# Altium PCB DiPho_PoE_adapter.PcbDoc
Units mm, origin at the board's own origin, x right, y up, seen from the top; angles counter-clockwise.
Board outline 57.6 x 55.8 mm, 4 copper layers (Top Layer, Inner Layer 1, Inner Layer 2, Bottom Layer), stack 1.51 mm thick; 53 components, 40 nets, 194 pads, 51 vias.
Unrouted connection lines stored in the file: 13.
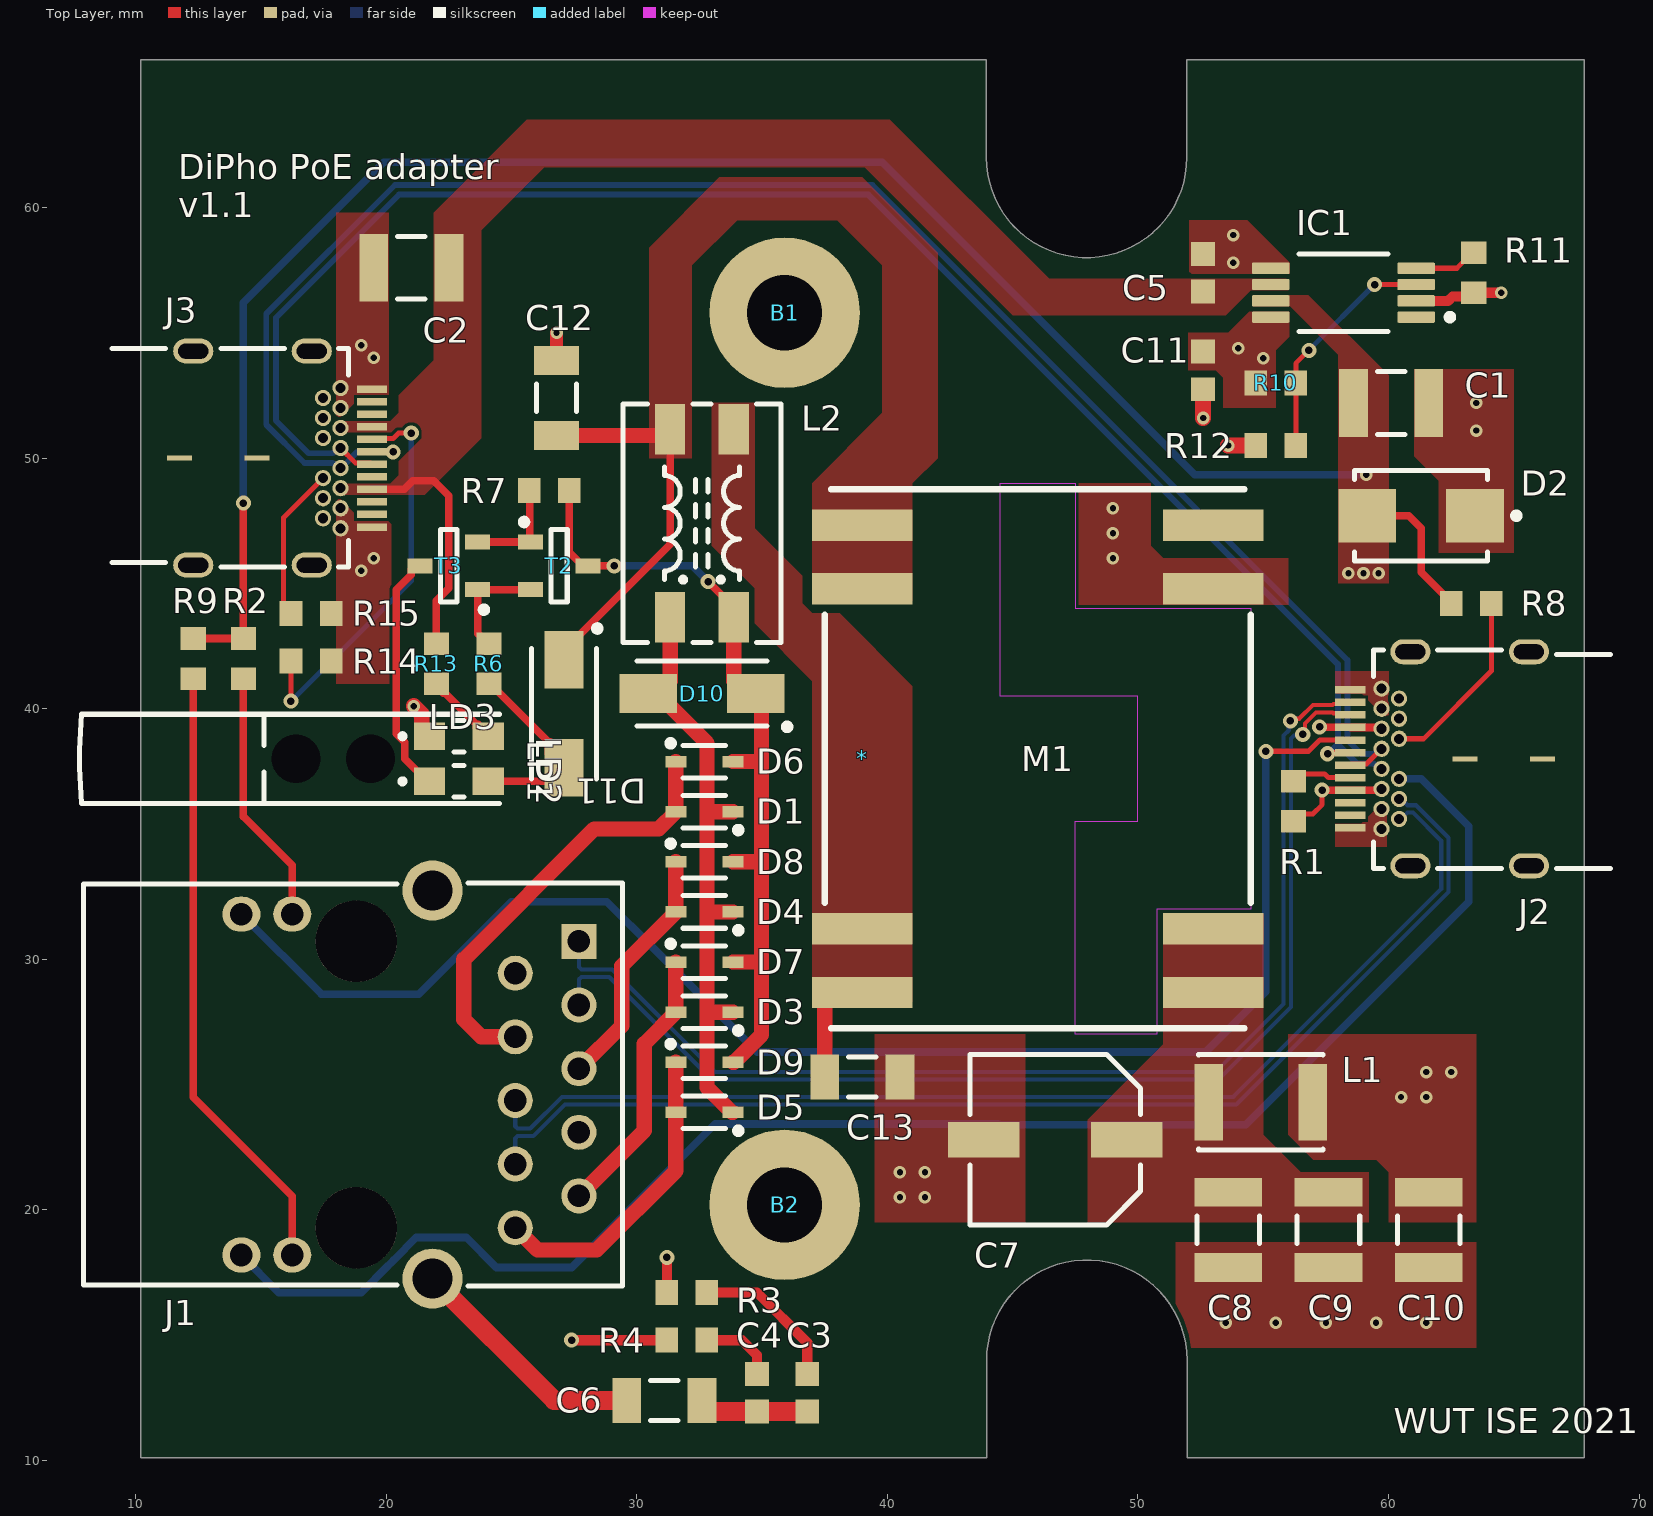
[diagram p0: Top Layer view]
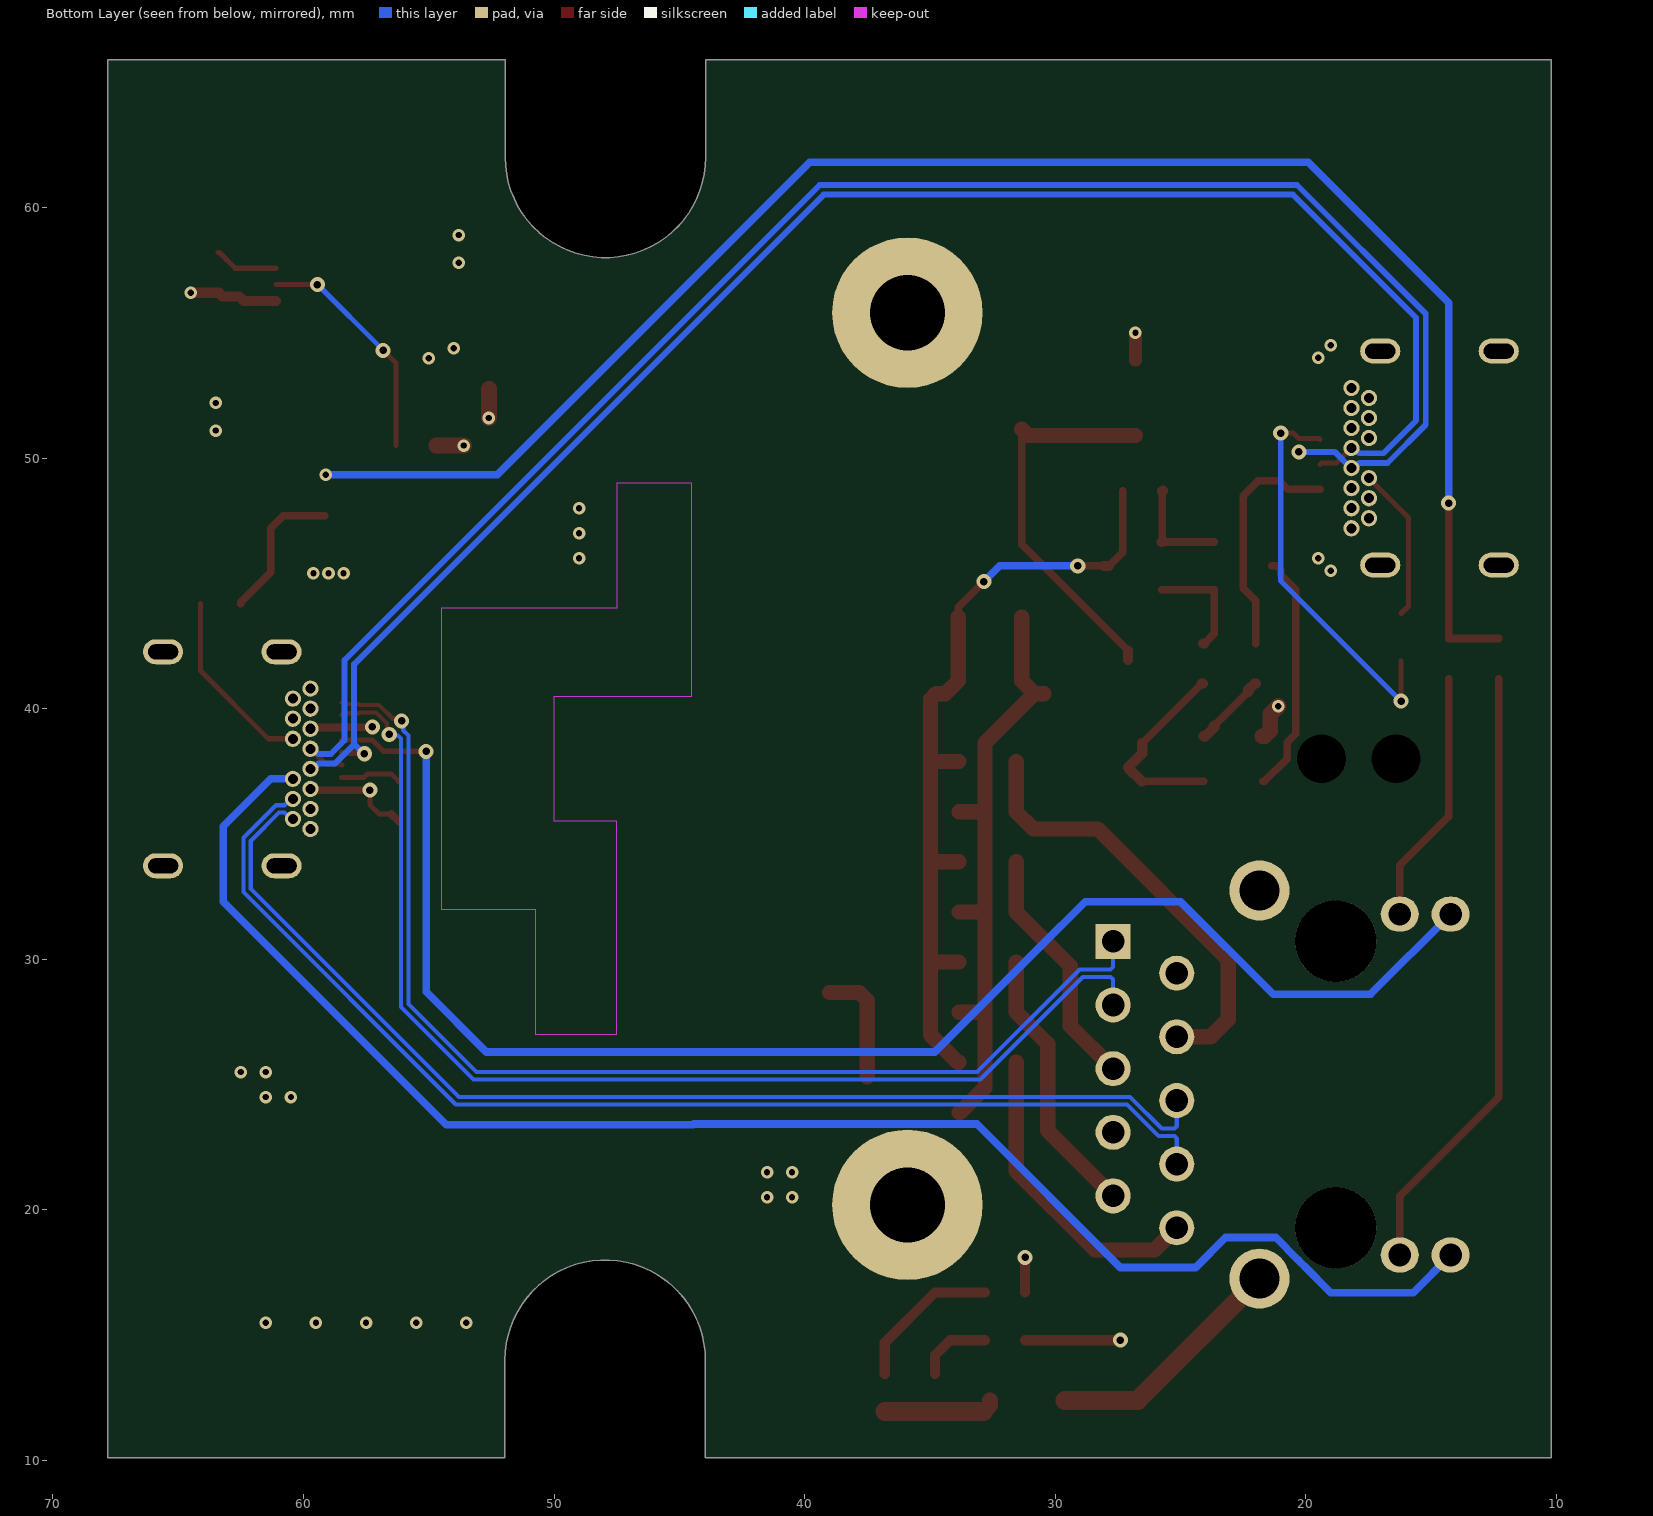
[diagram p1: Bottom Layer view, seen from below]
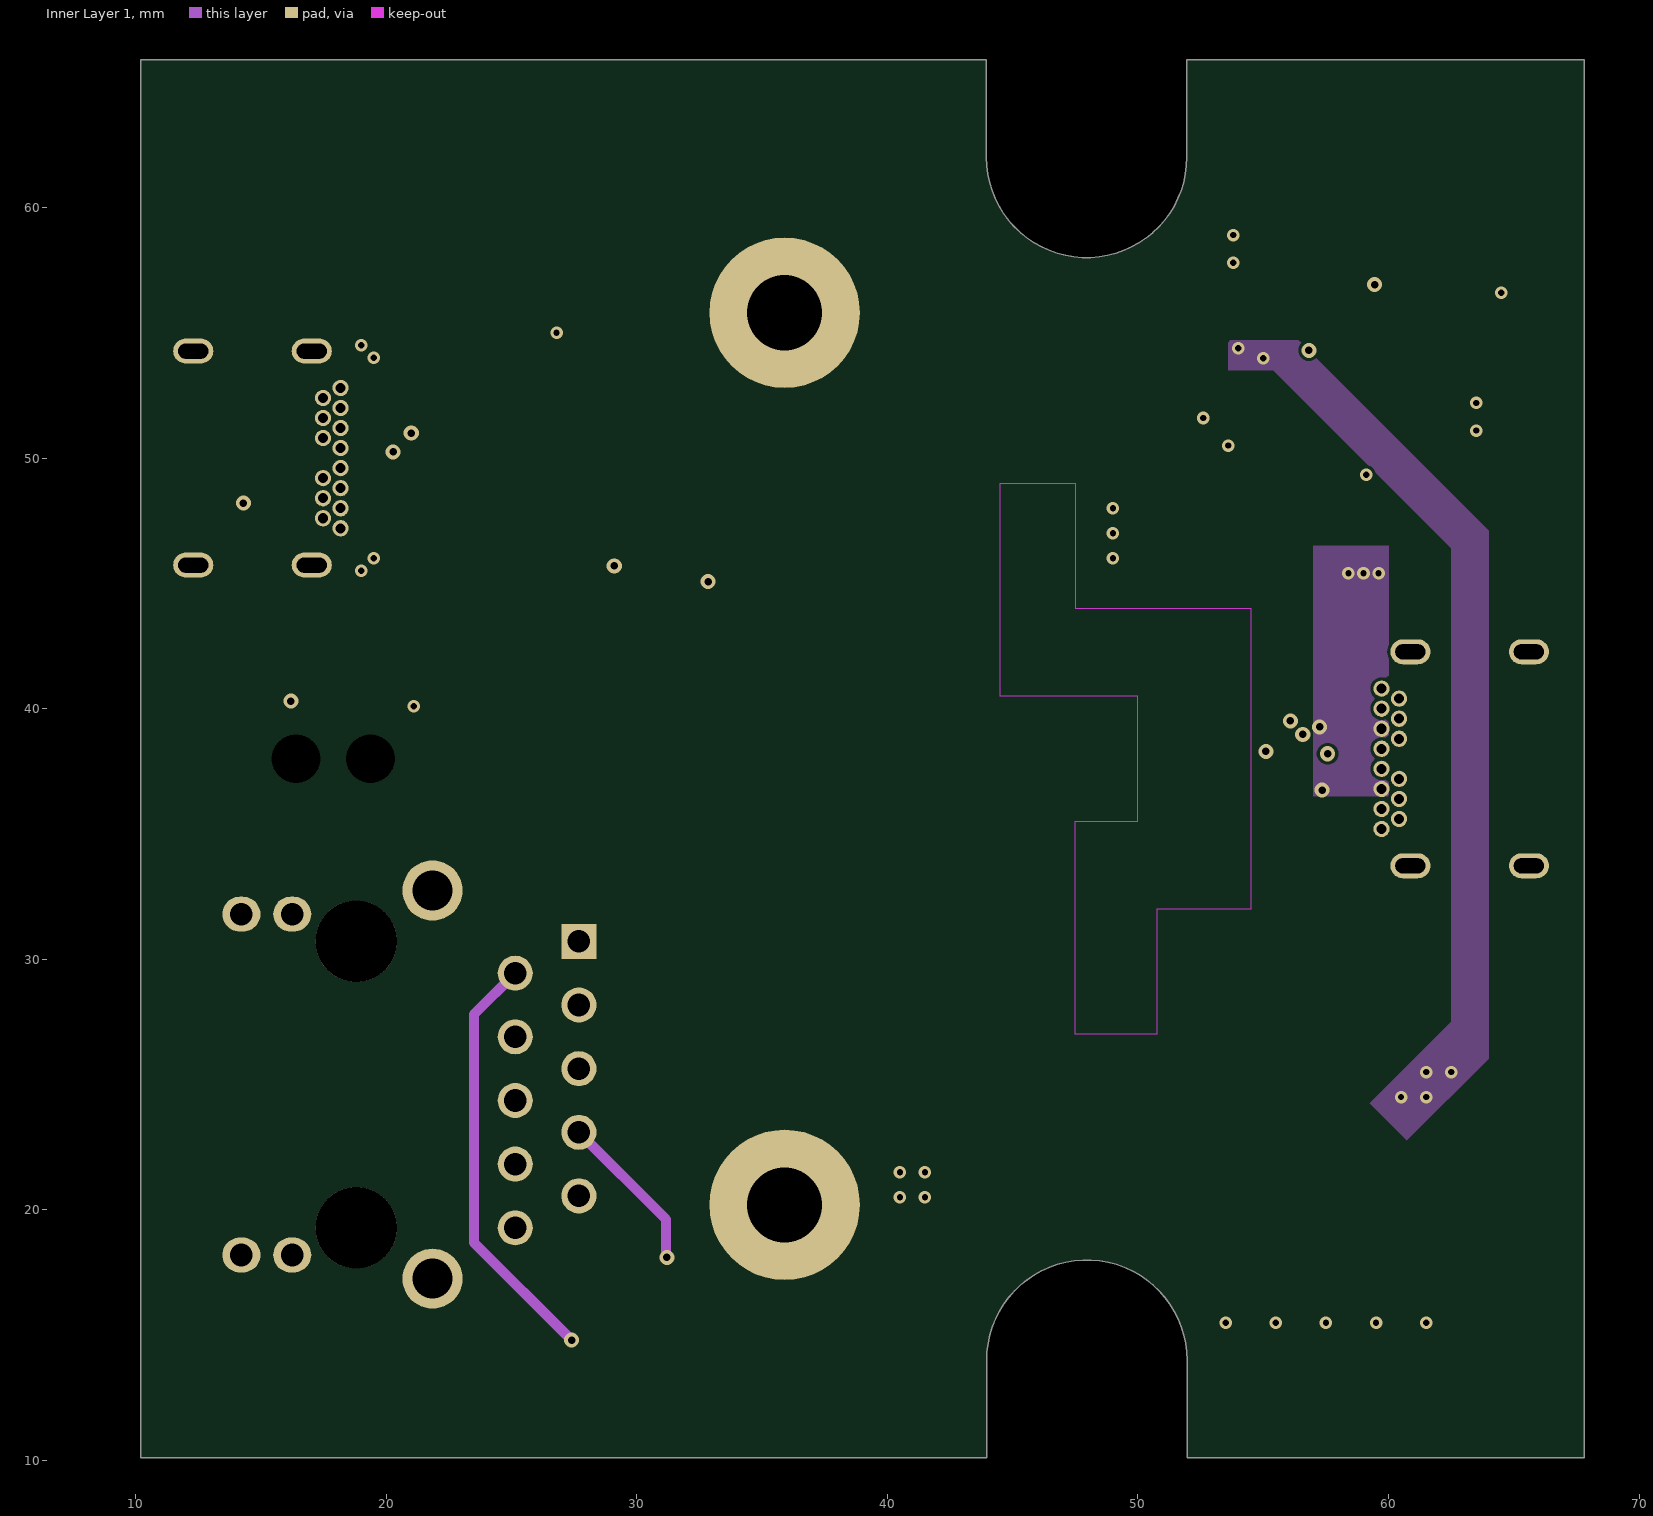
[diagram p2: Inner Layer 1]
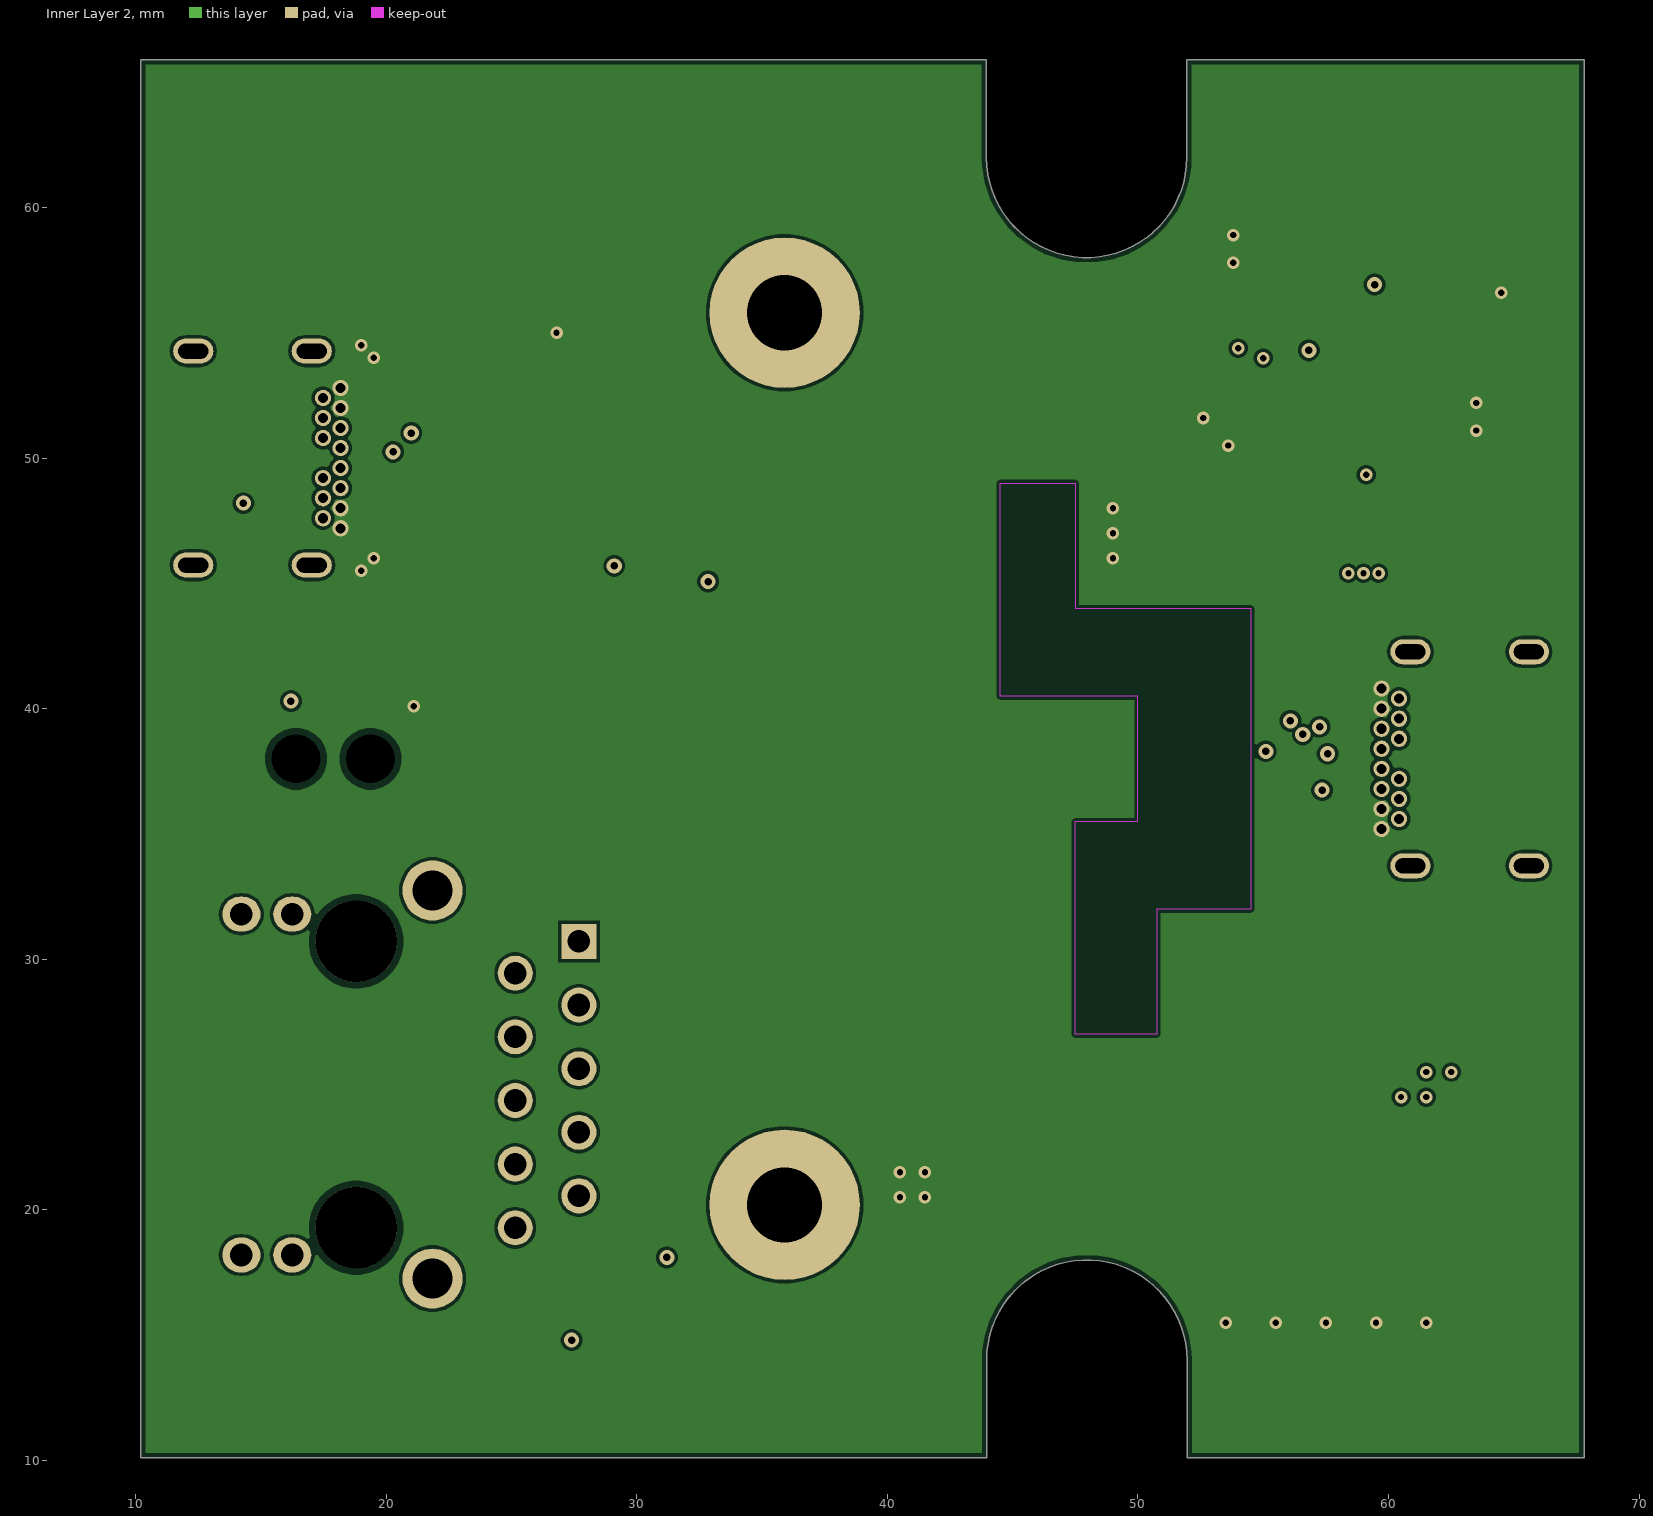
[diagram p3: Inner Layer 2]
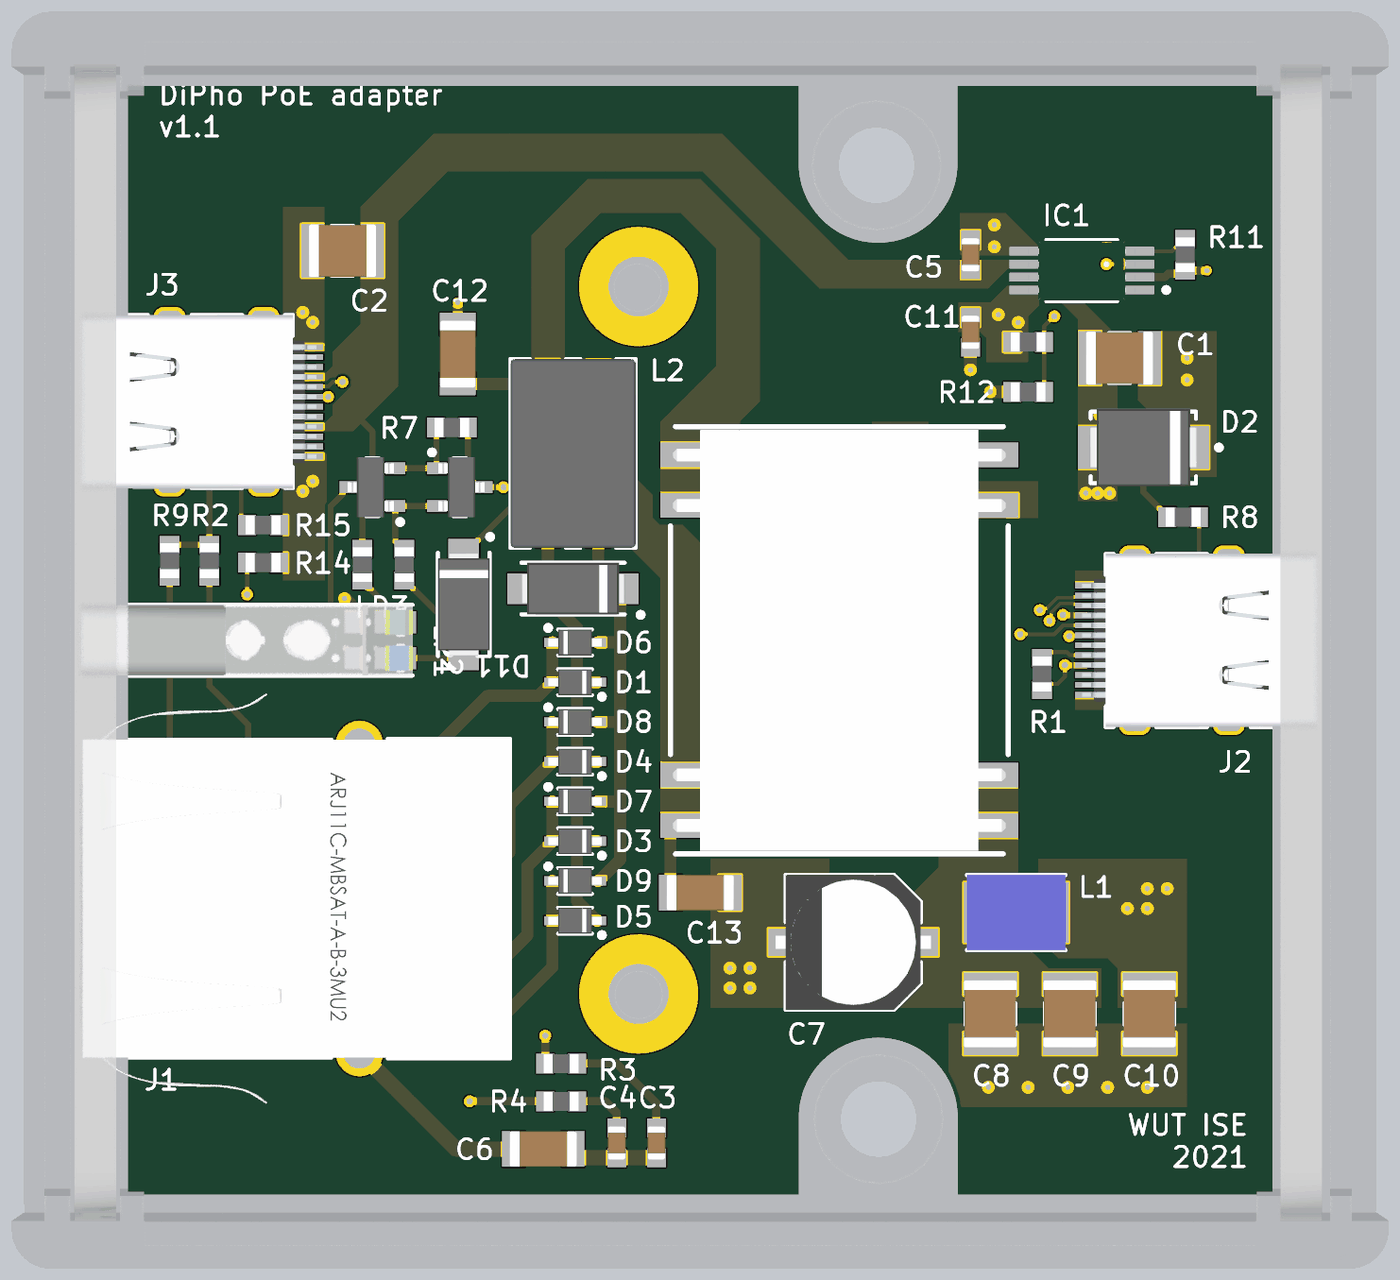
[diagram p4: 3D render of the assembled board from above, using the file's embedded part models]

## Layer stack, top to bottom
Top Solder: solder mask 0.0102, Solder Resist, Dk 3.5
Top Layer: signal copper 0.035
Dielectric 1: prepreg 0.22, PP-006, Dk 4.1
Inner Layer 1: signal copper 0.035
Dielectric 2: dielectric 0.93, FR-4, Dk 4.8
Inner Layer 2: signal copper 0.035
Dielectric 3: prepreg 0.22, PP-006, Dk 4.1
Bottom Layer: signal copper 0.035
Bottom Solder: solder mask 0.0102, Solder Resist, Dk 3.5

## Board outline
10.2,10.1 10.2,65.9 43.95,65.9 43.95,62 ccw(c47.95,62) 51.95,62 51.95,65.9 67.8,65.9 67.8,10.1 51.96,10.1 51.96,14 ccw(c47.96,14) 43.96,14 43.96,10.1

## Design rules (kind name [scope] priority, off if disabled: settings)
BoardOutlineClearance [All] p1: gap=0.2 ignorepadtopadclearanceinfootprint=FALSE
Clearance [All] p1: gap=0.127 ignorepadtopadclearanceinfootprint=FALSE except(0.25: Arc-Hole Track-Hole SMDPad-Hole THPad-Hole Via-Hole Fill-Hole Poly-Hole Region-Hole Text-Hole)
ComponentClearance [All] p1: gap=0.127 collisioncheckmode=3 verticalgap=0.127 showdistances=TRUE
DiffPairsRouting "Schematic Differential Pairs Routing_7" [InNet('SHIELD')] p1: maxlimit=0.152 minlimit=0.152 mostfreqgap=0.152 toplayer_minwidth=0.203 toplayer_maxwidth=0.235 toplayer_prefwidth=0.235 midlayer1_maxgap=0.152 midlayer1_minwidth=0.235 midlayer1_maxwidth=0.235 midlayer1_prefwidth=0.235 midlayer2_maxgap=0.152 midlayer2_minwidth=0.235 midlayer2_maxwidth=0.235 midlayer2_prefwidth=0.235 bottomlayer_minwidth=0.203 bottomlayer_maxwidth=0.235 bottomlayer_prefwidth=0.235 maxuncoupledlength=6.35
DiffPairsRouting "Schematic Differential Pairs Routing_6" [InNet('USB_D_P')] p2: maxlimit=0.152 minlimit=0.152 mostfreqgap=0.152 toplayer_minwidth=0.203 toplayer_maxwidth=0.235 toplayer_prefwidth=0.235 midlayer1_maxgap=0.127 midlayer1_minwidth=0.235 midlayer1_maxwidth=0.235 midlayer1_prefwidth=0.235 midlayer2_maxgap=0.127 midlayer2_minwidth=0.235 midlayer2_maxwidth=0.235 midlayer2_prefwidth=0.235 bottomlayer_minwidth=0.203 bottomlayer_maxwidth=0.235 bottomlayer_prefwidth=0.235 maxuncoupledlength=6.35
DiffPairsRouting "Schematic Differential Pairs Routing" [InNet('GND')] p3: maxlimit=0.127 minlimit=0.127 mostfreqgap=0.127 toplayer_minwidth=0.165 toplayer_maxwidth=0.165 toplayer_prefwidth=0.165 midlayer1_minwidth=0.165 midlayer1_maxwidth=0.165 midlayer1_prefwidth=0.165 midlayer2_minwidth=0.165 midlayer2_maxwidth=0.165 midlayer2_prefwidth=0.165 bottomlayer_minwidth=0.165 bottomlayer_maxwidth=0.165 bottomlayer_prefwidth=0.165 maxuncoupledlength=6.35
DiffPairsRouting "Schematic Differential Pairs Routing_14" [InNet('ETHU_TX_N')] p4: maxlimit=0.127 minlimit=0.127 mostfreqgap=0.127 toplayer_minwidth=0.165 toplayer_maxwidth=0.165 toplayer_prefwidth=0.165 midlayer1_minwidth=0.165 midlayer1_maxwidth=0.165 midlayer1_prefwidth=0.165 midlayer2_minwidth=0.165 midlayer2_maxwidth=0.165 midlayer2_prefwidth=0.165 bottomlayer_minwidth=0.165 bottomlayer_maxwidth=0.165 bottomlayer_prefwidth=0.165 maxuncoupledlength=6.35
DiffPairsRouting "Schematic Differential Pairs Routing_13" [InNet('ETHU_RX_N')] p5: maxlimit=0.127 minlimit=0.127 mostfreqgap=0.127 toplayer_minwidth=0.165 toplayer_maxwidth=0.165 toplayer_prefwidth=0.165 midlayer1_minwidth=0.165 midlayer1_maxwidth=0.165 midlayer1_prefwidth=0.165 midlayer2_minwidth=0.165 midlayer2_maxwidth=0.165 midlayer2_prefwidth=0.165 bottomlayer_minwidth=0.165 bottomlayer_maxwidth=0.165 bottomlayer_prefwidth=0.165 maxuncoupledlength=6.35
DiffPairsRouting "Schematic Differential Pairs Routing_11" [InNet('ETHU_TX_P')] p6: maxlimit=0.127 minlimit=0.127 mostfreqgap=0.127 toplayer_minwidth=0.165 toplayer_maxwidth=0.165 toplayer_prefwidth=0.165 midlayer1_minwidth=0.165 midlayer1_maxwidth=0.165 midlayer1_prefwidth=0.165 midlayer2_minwidth=0.165 midlayer2_maxwidth=0.165 midlayer2_prefwidth=0.165 bottomlayer_minwidth=0.165 bottomlayer_maxwidth=0.165 bottomlayer_prefwidth=0.165 maxuncoupledlength=6.35
DiffPairsRouting "Schematic Differential Pairs Routing_10" [InNet('ETHU_RX_P')] p7: maxlimit=0.127 minlimit=0.127 mostfreqgap=0.127 toplayer_minwidth=0.165 toplayer_maxwidth=0.165 toplayer_prefwidth=0.165 midlayer1_minwidth=0.165 midlayer1_maxwidth=0.165 midlayer1_prefwidth=0.165 midlayer2_minwidth=0.165 midlayer2_maxwidth=0.165 midlayer2_prefwidth=0.165 bottomlayer_minwidth=0.165 bottomlayer_maxwidth=0.165 bottomlayer_prefwidth=0.165 maxuncoupledlength=6.35
DiffPairsRouting "Schematic Differential Pairs Routing_5" [InNet('VBUS')] p8: maxlimit=0.127 minlimit=0.127 mostfreqgap=0.127 toplayer_minwidth=0.165 toplayer_maxwidth=0.165 toplayer_prefwidth=0.165 midlayer1_minwidth=0.165 midlayer1_maxwidth=0.165 midlayer1_prefwidth=0.165 midlayer2_minwidth=0.165 midlayer2_maxwidth=0.165 midlayer2_prefwidth=0.165 bottomlayer_minwidth=0.165 bottomlayer_maxwidth=0.165 bottomlayer_prefwidth=0.165 maxuncoupledlength=6.35
DiffPairsRouting DiffPairsRouting_100R [All] p9: maxlimit=0.127 minlimit=0.127 mostfreqgap=0.127 toplayer_minwidth=0.381 toplayer_maxwidth=0.381 toplayer_prefwidth=0.381 midlayer1_minwidth=0.381 midlayer1_maxwidth=0.381 midlayer1_prefwidth=0.381 midlayer2_minwidth=0.381 midlayer2_maxwidth=0.381 midlayer2_prefwidth=0.381 bottomlayer_minwidth=0.381 bottomlayer_maxwidth=0.381 bottomlayer_prefwidth=0.381 maxuncoupledlength=7.5
DiffPairsRouting [All] p10: maxlimit=0.254 minlimit=0.127 mostfreqgap=0.254 toplayer_prefgap=0.127 toplayer_minwidth=0.127 toplayer_maxwidth=25.4 toplayer_prefwidth=0.127 midlayer1_mingap=0.254 midlayer1_minwidth=0.381 midlayer1_maxwidth=0.381 midlayer1_prefwidth=0.381 midlayer2_mingap=0.254 midlayer2_minwidth=0.381 midlayer2_maxwidth=0.381 midlayer2_prefwidth=0.381 bottomlayer_prefgap=0.127 bottomlayer_minwidth=0.127 bottomlayer_maxwidth=25.4 bottomlayer_prefwidth=0.127 maxuncoupledlength=12.7
Height [All] p1: minheight=0 maxheight=1816.048 prefheight=12.7
HoleSize [All] p1: absolutevalues=TRUE maxlimit=6.3 minlimit=0.3 maxpercent=80.000 minpercent=20.000
HoleToHoleClearance [All] p1: gap=0.25 allowstackedmicrovias=FALSE
MinimumAnnularRing [All] p1: minimumring=0.076
MinimumSolderMaskSliver [All] p1: minsoldermaskwidth=0
PlaneClearance [All] p1: clearance=0.127
PlaneConnect PlaneConnectPowerPads [InPadClass('PowerPads')] p1: planeconnectstyle=Direct reliefexpansion=0.508 reliefentries=4 reliefconductorwidth=0.254 reliefairgap=0.254
PlaneConnect [All] p2: pad.planeconnectstyle=Relief pad.reliefexpansion=0.3 pad.reliefentries=4 pad.reliefconductorwidth=0.127 pad.reliefairgap=0.127 via.planeconnectstyle=Direct via.reliefexpansion=0.3 via.reliefentries=4 via.reliefconductorwidth=0.127 via.reliefairgap=0.127
PolygonConnect PolygonConnectPowerPads [All vs (InPadClass('PowerPads'))] p1: connectstyle=Direct reliefconductorwidth=0.254 reliefentries=4 polygonreliefangle="90 Angle" airgapwidth=0.254
PolygonConnect [All] p2: connectstyle=Direct reliefconductorwidth=0.127 reliefentries=4 polygonreliefangle="90 Angle" airgapwidth=0.127
RoutingVias [All] p1: holewidth=0.3 width=0.6 viastyle="Through Hole" minholewidth=0.3 minwidth=0.6 maxholewidth=0.6 maxwidth=6.6
SilkToSilkClearance [All] p1: silktosilkclearance=0
SilkToSolderMaskClearance [IsPad] p1: minsilkscreentomaskgap=0.127 clearancetoexposedcopper=TRUE
SolderMaskExpansion [All] p1: expansion=0.075 istentingtop=FALSE
Width [All] p1: maxlimit=25.4 minlimit=0.127 preferedwidth=0.127 minimp=50.000000 maximp=50.000000 favimp=50.000000
20 further rules are at their usual default settings.

## Classes and differential pairs
differential pair USB_D: +USB_D_P -USB_D_N
differential pair ETHU_TX: +ETHU_TX_P -ETHU_TX_N
differential pair ETHU_RX: +ETHU_RX_P -ETHU_RX_N

## Components (designator, comment, footprint, x,y, rotation, side; value= is the part's Value field where it differs from the comment)
* "KradexZ67" KradexZ67 39,38 r90 top
B1 "Plated Hole" MTG300_600 35.9,55.8 r0 top locked
B2 "Plated Hole" MTG300_600 35.9,20.2 r0 top locked
C1 "10uF" CAPC3225X270N 60.1,52.2 r180 top
C2 "10uF" CAPC3225X270N 21,57.6 r0 top
C3 "100nF" CAPC1608X90N 36.8,12.7 r90 top
C4 "100nF" CAPC1608X90N 34.8,12.7 r90 top
C5 "100nF" CAPC1608X90N 52.6,57.4 r270 top
C6 "1nF" CAPC3216X180N 31.1,12.4 r0 top
C7 "100uF" PNSC-EEEFK1C101P_L 46.7,22.8 r180 top
C8 "10uF" CAPC3225X270N 53.6,19.2 r270 top
C9 "10uF" CAPC3225X270N 57.6,19.2 r270 top
C10 "10uF" CAPC3225X270N 61.6,19.2 r270 top
C11 "100nF" CAPC1608X90N 52.6,53.5 r90 top
C12 "4.7nF" CAPC3216X180N 26.8,52.4 r270 top
C13 "4.7nF" CAPC3216X180N 39,25.3 r180 top
D1 "PMEG6010CEJ" SODFL2513X80N 32.699,35.888 r180 top
D2 "SMBJ5V0CA" DIOM5336X265N 61.3,47.7 r180 top
D3 "PMEG6010CEJ" SODFL2513X80N 32.699,27.888 r180 top
D4 "PMEG6010CEJ" SODFL2513X80N 32.699,31.888 r180 top
D5 "PMEG6010CEJ" SODFL2513X80N 32.699,23.888 r180 top
D6 "PMEG6010CEJ" SODFL2513X80N 32.699,37.888 r0 top
D7 "PMEG6010CEJ" SODFL2513X80N 32.699,29.888 r0 top
D8 "PMEG6010CEJ" SODFL2513X80N 32.699,33.888 r0 top
D9 "PMEG6010CEJ" SODFL2513X80N 32.699,25.888 r0 top
D10 "SMAJ60CA" DIOM5226X262N 32.6,40.6 r180 top
D11 "1SMA5918BT3G" DIOM5226X220N 27.1,39.8 r270 top
IC1 "TPS2113APWR" FP-PW0008A-MFG 58.2,56.6 r180 top
J1 "RJ45" ABRACON_ARJM11C7-114-BA-EW2 18.8,25 r270 top locked
J2 "USB 3.1 Type C Receptacle" 632723300011 64.4,38 r90 top locked
J3 "USB 3.1 Type C Receptacle" 632723300011 13.5,50 r270 top locked
L1 "1.5uH" IND_COILCRAFT_1812CS 54.9,24.3 r0 top
L2 "2x1mH" IND_WURTH_WE-SL2 32.6,47.4 r90 top
LD2 "Green" LED_KINGBRIGHT_KPT-2012ZGC 22.9,38.9 r0 top
LD3 "Blue" LED_KINGBRIGHT_KPT-2012VBC-D 22.9,37.1 r0 top
LP1 "" LEDLP_DIALIGHT_515-1049F 23.26,38 r0 top
M1 "AG9905-MT" SILVERTEL_AG9900 46,38 r270 top
R1 "5k1" RESC1608X55N 56.2,36.3 r270 top
R2 "280" RESC1608X55N 14.3,42 r90 top
R3 "75" RESC1608X55N 32,16.7 r180 top
R4 "75" RESC1608X55N 32,14.8 r180 top
R6 "47k" RESC1608X55N 24.1,41.8 r270 top
R7 "330" RESC1608X55N 26.5,48.7 r180 top
R8 "5k1" RESC1608X55N 63.3,44.2 r180 top
R9 "330" RESC1608X55N 12.3,42 r90 top
R10 "47k" RESC1608X55N 55.5,53 r180 top
R11 "330" RESC1608X55N 63.4,57.4 r270 top
R12 "47k" RESC1608X55N 55.5,50.5 r0 top
R13 "280" RESC1608X55N 22,41.8 r90 top
R14 "5k1" RESC1608X55N 17,41.9 r180 top
R15 "5k1" RESC1608X55N 17,43.8 r180 top
T2 "MMBT3904" SOT95P230X110-3N 26.9,45.7 r0 top
T3 "MMBT3904" SOT95P230X110-3N 22.5,45.7 r180 top

## Footprints (in the part's own frame and the unit in brackets; to place one, negate y for a bottom-side part, rotate by r counter-clockwise, add the part's x,y. Pads: shape width x height; smd on the part's side, far side on the other; paste and mask are expansions set on the pad)
632723300011 [mm] "USB 3.1 Type C Receptacle Horizontal THR"
  rect 0.3x1.2 smd: A1(-2.75,5.93) A2(-2.25,5.93) A3(-1.75,5.93) A4(-1.25,5.93) A5(-0.75,5.93) A6(-0.25,5.93) A7(0.25,5.93) A8(0.75,5.93) A9(1.25,5.93) A10(1.75,5.93) A11(2.25,5.93) A12(2.75,5.93)
  round 0.65 hole 0.4: B1(2.8,4.68) B2(2.4,3.98) B3(1.6,3.98) B4(1.2,4.68) B5(0.8,3.98) B6(0.4,4.68) B7(-0.4,4.68) B8(-0.8,3.98) B9(-1.2,4.68) B10(-1.6,3.98) B11(-2.4,3.98) B12(-2.8,4.68) G1(2,4.68) G2(-2,4.68)
  oval 1x1.6 hole 0.6 slot 1.2 at 90 deg: Shell(-4.27,-1.2) Shell(-4.27,3.53) Shell(4.27,-1.2) Shell(4.27,3.53)
  rect 0.2x1 smd: Shell(0,1.35) Shell(0,-1.75)
  silkscreen extent -4.37,-4.45 4.34,5, body extent -4.37,-5.6 4.37,6.19, height 3.05
ABRACON_ARJM11C7-114-BA-EW2 [mm]
  round 1.4 hole 0.9: 1(5.715,6.35) 2(4.445,8.89) 3(3.175,6.35) 4(1.905,8.89) 5(0.635,6.35) 6(-0.635,8.89) 7(-1.905,6.35) 8(-3.175,8.89) 9(-4.445,6.35)
  rect 1.4x1.4 hole 0.9: 10(-5.715,8.89)
  oval 1.4x1.52 hole 0.9: L1(-6.8,-2.55) L2(-6.8,-4.58) L3(6.8,-2.55) L4(6.8,-4.58)
  round 3.25 hole 3.25 unplated: MH1(-5.715,0) MH2(5.715,0)
  round 2.4 hole 1.6: S1(-7.745,3.05) S2(7.745,3.05)
  silkscreen extent -8.04,-10.87 8.04,10.63, body extent -10.33,-10.87 10.33,10.63, height 16.15
CAPC1608X90N [mm] "Chip Capacitor, Body 1.6x0.8mm IPC Medium Density"
  rect 0.95x0.95 smd: 1(-0.75,0) 2(0.75,0)
  body extent -0.85,-0.45 0.85,0.45, height 0.9
CAPC3216X180N [mm] "Chip Capacitor, Body 3.2x1.6mm, IPC Medium Density"
  rect 1.15x1.8 smd: 1(-1.5,0) 2(1.5,0)
  silkscreen extent -0.55,-0.8 0.55,0.8, body extent -1.7,-0.9 1.7,0.9, height 1.8
CAPC3225X270N [mm] "Chip Capacitor, Body 3.2x2.5mm, IPC Medium Density"
  rect 1.15x2.7 smd: 1(-1.5,0) 2(1.5,0)
  silkscreen extent -0.55,-1.25 0.55,1.25, body extent -1.7,-1.35 1.7,1.35, height 2.7
DIOM5226X220N [mm] "DO-214-AC/SMA Diode, Molded Body; 5.21mm L X 2.60mm W X 2.20mm H, IPC Medium Density"
  rect 2.3x1.55 smd: 1(-2.15,0) 2(2.15,0)
  silkscreen extent -3.52,-1.3 2.6,1.45, body extent -2.6,-1.3 2.6,1.3, height 2.2
DIOM5226X262N [mm] "DO-214-AC/SMA Diode, Molded Body; 5.21mm L X 2.605mm W X 2.62mm H, IPC Medium Density"
  rect 2.3x1.55 smd: 1(-2.15,0) 2(2.15,0)
  silkscreen extent -3.53,-1.3 2.6,1.45, body extent -2.6,-1.3 2.6,1.31, height 2.62
DIOM5336X265N [mm] "DO-214-AA/SMB Diode, Molded Body; 5.34mm L X 3.625mm W X 2.65mm H, IPC Medium Density"
  rect 2.3x2.15 smd: 1(-2.15,0) 2(2.15,0)
  silkscreen extent -3.93,-1.8 2.65,1.8, body extent -2.7,-1.95 2.7,1.95, height 2.4
FP-PW0008A-MFG [mm]
  rrect22% 1.5x0.45 smd paste+0 mask+0: 1(-2.9,0.975) 2(-2.9,0.325) 3(-2.9,-0.325) 4(-2.9,-0.975) 5(2.9,-0.975) 6(2.9,-0.325) 7(2.9,0.325) 8(2.9,0.975)
  silkscreen extent -4.38,-1.55 1.77,1.55, body extent -3.75,-1.8 3.75,1.8, height 0.25
IND_COILCRAFT_1812CS [mm] "SMD Inductor, Body Width 4.95mm Body Lenght 3.81mm Height 3.43mm, 1812CS Series"
  rect 1.14x3.05 smd: 1(-2.07,0) 2(2.07,0)
  silkscreen extent -2.47,-1.91 2.48,1.91, body extent -2.47,-1.9 2.48,1.91, height 3.43
IND_WURTH_WE-SL2 [mm] "Common Mode SMD Line Filter WE-SL2"
  rect 2x1.2 smd: 1(-3.75,1.27) 2(-3.75,-1.27) 3(3.75,-1.27) 4(3.75,1.27)
  silkscreen extent -4.75,-3.15 4.75,3.15, body extent -4.75,-3.15 4.75,3.15, height 5.3
KradexZ67 [mm]
  body extent -31.63,-34.65 31.63,34.65, height 17.4
LED_KINGBRIGHT_KPT-2012VBC-D [mm] "Blue SMD LED, Case 2012, Body L 2.00mm X  W 1.25mm X H 0.75mm"
  rect 1.25x1.1 smd: 1(-1.175,0) 2(1.175,0)
  silkscreen extent -2.35,-0.63 0.2,0.63, body extent -1,-0.62 1,0.63, height 0.75
LED_KINGBRIGHT_KPT-2012ZGC [mm] "Green SMD LED, Case 2012, Body L 2.00mm X  W 1.25mm X H 0.75mm"
  rect 1.25x1.1 smd: 1(-1.175,0) 2(1.175,0)
  silkscreen extent -2.35,-0.63 0.2,0.63, body extent -1,-0.62 1,0.63, height 0.75
LEDLP_DIALIGHT_515-1049F [mm] "Right Angle Single Element 3.56mm Round Lightpipe"
  round 1 hole 1.95 unplated mask+0.475: 1(-6.86,0) 2(-3.89,0)
  silkscreen extent -15.5,-1.78 1.27,1.78, body extent -15.5,-1.78 1.27,1.78, height 5.27
MTG300_600 [mm] "Plated Through Hole: Hole Dia.=3.0mm Pad Dia.=6.0mm"
  round 6 hole 3: 1(0,0)
PNSC-EEEFK1C101P_L [mm] "Aluminum Electrolytic Capacitor, Body 6.8x6.8mm, IPC High Density"
  rect 2.85x1.4 smd: 1(-2.85,0) 2(2.85,0)
  silkscreen extent -3.4,-3.4 3.4,3.4, body extent -3.9,-3.4 3.9,3.4, height 6.3
RESC1608X55N [mm] "Chip Resistor, EIA 0603, Metric 1608, Body 1.6x0.8mm, IPC Medium Density"
  rect 0.9x1 smd: 1(-0.8,0) 2(0.8,0)
  body extent -0.87,-0.47 0.88,0.48, height 0.55
SILVERTEL_AG9900 [mm]
  rect 1.25x4 smd: 1(9.325,7) 2(6.785,7) 3(-6.785,7) 4(-9.325,7) 5(-9.325,-7) 6(-6.785,-7) 7(6.785,-7) 8(9.325,-7)
  Keep-Out Layer region: 11,4.75 11,1.5 2.5,1.5 2.5,4 -2.5,4 -2.5,-1.5 -11,-1.5 -11,1.5 -6,1.5 -6,8.5 6,8.5 6,4.75
  silkscreen extent -10.75,-8.5 10.75,8.5, body extent -10.59,-8.37 10.6,8.37, height 13.35
SODFL2513X80N [mm] "SODFL Diode (SOD323F); 1.70mm W X 1.25mm L X 0.80mm H body, IPC Medium Density"
  rect 0.84x0.46 smd: 1(-1.14,0) 2(1.14,0)
  silkscreen extent -1.48,-0.65 0.85,0.85, body extent -1.35,-0.65 1.35,0.65, height 0.8
SOT95P230X110-3N [mm] "SOT23, 3 pin, Pitch 0.95mm - 1.3mm W X 2.9mm L X 1.1mm H, IPC Medium Density"
  rect 1x0.6 smd: 1(-1.15,0.95) 2(-1.15,-0.95) 3(1.15,0)
  silkscreen extent -1.52,-1.45 0.33,1.87, body extent -1.08,-1.5 1.25,1.5, height 1.1

## Part data
B1 B2: library part PLATED_HOLE3.0_PAD6.0, "Single Terminal Socket", Author="CERN DEM JLC", Component Type="Standard (No BOM)", ComponentHeight=0mm, CreateDate=26.05.2008, Family="Plated Hole", HelpURL=Undefined, LatestRevisionDate=26.05.2008, Mounted=No, PackageDescription="Plated Through Hole: Hole Dia.=3.0mm Pad Dia.=6.0mm", Part Description="Plated Through Hole: Hole Dia.=3.0mm Pad Dia.=6.0mm", Part Number=PLATED_HOLE3.0_PAD6.0, Pin Count=1, Sense=No, SMD=No, Socket=No, Status=None
C1 C2 C8 C9 C10: library part CC1210_10UF_25V_10%_X7R, "Non-polarised capacitor", Case=1210, Manufacturer=GENERIC, Manufacturer1 ComponentHeight=2.7mm, Manufacturer1 Example=KEMET, Manufacturer1 Part Number=C1210C106K4RACTU, Tolerance=±10%, Voltage=25V, Author="CERN DEM JLC", Component Type=Standard, CreateDate=05.05.2009, HelpURL=\\cern.ch\dfs\Applications\Altium\Datasheets\CC1210_X7R_KEMET.pdf, LatestRevisionDate=01.04.2010, Manufacturer Part Number=CC1210_10UF_25V_10%_X7R, Mounted=Yes, Part Description="SMD Multilayer Chip Ceramic Capacitor", Part Number=CC1210_10UF_25V_10%_X7R, Pin Count=2, Sense=No, SMD=Yes, Socket=No, Status=None, TC=X7R
C3 C4 C5 C11: library part CC0603_100NF_100V_10%_X7R, "Non-polarised capacitor", Case=0603, Manufacturer=GENERIC, Manufacturer1 ComponentHeight=0.9mm, Manufacturer1 Example=MURATA, Manufacturer1 Part Number=GRM188R72A104KA35D, Tolerance=±10%, Voltage=100V, Author="CERN DEM JLC", Component Type=Standard, CreateDate=11.12.2013, HelpURL=\\cern.ch\dfs\Applications\Altium\Datasheets\CC0603_MURATA_GRM188R72A104KA35D.pdf, LatestRevisionDate=11.12.2013, Manufacturer Part Number=CC0603_100NF_100V_10%_X7R, Mounted=Yes, Part Description="SMD Multilayer Chip Ceramic Capacitor", Part Number=CC0603_100NF_100V_10%_X7R, Pin Count=2, Sense=No, SMD=Yes, Socket=No, Status=None, TC=X7R
C6 C12 C13: library part CC1206_1NF_2KV_10%_X7R, "Non-polarised capacitor", Case=1206, Manufacturer=GENERIC, Manufacturer1 ComponentHeight=1.8mm, Manufacturer1 Example=AVX, Manufacturer1 Part Number=1206GC102KAT2A, Tolerance=±10%, Voltage=2kV, Author="CERN DEM JLC", Component Type=Standard, CreateDate=19.11.2012, HelpURL=\\cern.ch\dfs\Applications\Altium\Datasheets\CC1206_X7R_AVX_HV-MLC.pdf, LatestRevisionDate=17.05.2017, Manufacturer Part Number=CC1206_1NF_2KV_10%_X7R, Mounted=Yes, Part Description="High Voltage MLC Chip Capacitor", Part Number=CC1206_1NF_2KV_10%_X7R, Pin Count=2, Sense=No, SMD=Yes, Socket=No, Status=None, TC=X7R
C7: library part CMP-2000-06203-1, "Aluminum Electrolytic Capacitor, 100 uF, 20%, 16 V, -55 to 105 degC, 2-Pin SMD, RoHS, Tape and Reel", Capacitance=100µF, Case Size/Dimension=Ø6.3x5.8mm, Lifetime@Temperature=2000Hrs@105°C, Manufacturer=Panasonic, Operating Temp Range=-55to+105°C, Operating Temp-Max=105°C, Package Description="2-Pin Surface Mount Device, Body 6.6 x 6.6 mm", Package Reference=EEEFK1C101P, Rated Voltage=16V, Ripple Current=240mA, Datasheet URL=http://datasheet.octopart.com/EEEFK1C101P-Panasonic-datasheet-13266987.pdf, Datasheet Version=11/2012, Impedance=0.36O, Manufacturer URL=http://www.panasonic.com/, Mounting Technology=SurfaceMount, Series=FK, Type=Can
D1 D3 D4 D5 D6 D7 D8 D9: "Schottky Diode", Case=SOD-323F, Manufacturer=NEXPERIA, Power=1A, Voltage=60V, Author="CERN DEM BC", Bonding=No, Component Type=Standard, ComponentHeight=0.8mm, CreateDate=20.08.2020, Device=PMEG6010CEJ, HelpURL=\\cern.ch\dfs\Applications\Altium\Datasheets\PMEG6010CEJ.pdf, LatestRevisionDate=20.08.2020, Manufacturer Part Number=PMEG6010CEJ, Mounted=Yes, PackageDescription="SODFL Diode (SOD323F); 1.70mm W X 1.25mm L X 0.80mm H body, IPC Medium Density", Part Description="1A Very Low Vf MEGA Schottky Barrier Rectifier", Part Number=PMEG6010CEJ, Pin Count=2, PressFit=No, Sense=No, SMD=Yes, Socket=No
D2: "Transient Voltage Suppressor Diode (Bi-Directional)", Case=DO-214AA, Manufacturer="FAIRCHILD SEMICONDUCTOR", Power=600W, Voltage=5V, Author="CERN DEM JLC", Bonding=No, Component Type=Standard, ComponentHeight=2.65mm, CreateDate=11.06.2008, Device=SMBJ5V0CA, HelpURL=\\cern.ch\dfs\Applications\Altium\Datasheets\SMBJ.pdf, LatestRevisionDate=19.12.2011, Manufacturer Part Number=SMBJ5V0CA, Mounted=Yes, PackageDescription="DO-214-AA/SMB Diode, Molded Body; 5.34mm L X 3.625mm W X 2.65mm H, IPC Medium Density", Part Description="Bi-Directional Transient Voltage Suppressor Diode", Part Number=SMBJ5V0CA, Pin Count=2, PressFit=No, Sense=No, SMD=Yes, Socket=No
D10: "Transient Voltage Suppressor Diode (Bi-Directional)", Case=DO-214AC, Manufacturer=BOURNS, Power=400W, Voltage=60V, Author="CERN DEM JLC", Bonding=No, Component Type=Standard, ComponentHeight=2.62mm, CreateDate=12.03.2019, Device=SMAJ60CA, HelpURL=\\cern.ch\dfs\Applications\Altium\Datasheets\SMAJ60CA.pdf, LatestRevisionDate=12.03.2019, Manufacturer Part Number=SMAJ60CA, Mounted=Yes, PackageDescription="DO-214-AC/SMA Diode, Molded Body; 5.21mm L X 2.605mm W X 2.62mm H, IPC Medium Density", Part Description="Surface Mount Bi-directional Transient Voltage Suppressor Diode", Part Number=SMAJ60CA, Pin Count=2, PressFit=No, Sense=No, SMD=Yes, Socket=No
D11: "Zener Diode", Case=DO-214AC, Manufacturer="ON SEMICONDUCTOR", Power=1.5W, Voltage=5.1V, Author="CERN DEM JLC", Bonding=No, Component Type=Standard, ComponentHeight=2.20mm, CreateDate=16.02.2012, Device=1SMA5918BT3G, HelpURL=\\cern.ch\dfs\Applications\Altium\Datasheets\1SMA5918BT3G.pdf, LatestRevisionDate=16.02.2012, Manufacturer Part Number=1SMA5918BT3G, Mounted=Yes, PackageDescription="DO-214-AC/SMA Diode, Molded Body; 5.21mm L X 2.60mm W X 2.20mm H, IPC Medium Density", Part Description="Zener Voltage Regulators", Part Number=1SMA5918BT3G, Pin Count=2, PressFit=No, Sense=No, SMD=Yes, Socket=No
IC1: library part CMP-0339-00047-3, "IC OR CTRLR SRC SELECT 8TSSOP", Case/Package=TSSOP, Current - Output 2=1.25A, Max Input Voltage=5.5V, Max Operating Temperature=85°C, Max Power Dissipation=387mW, Min Input Voltage=2.8V, Min Operating Temperature=-40°C, On-State Resistance=84mR, Operating Supply Current=55uA, Output Voltage=6V, Package Quantity=2000, Lead Free="Lead Free", Max Output Current=1.25A, Number of Inputs=2, Number of Outputs=1, Number of Pins=8, Operating Supply Voltage=5.5V, Output Current=1.25A, Packaging="Tape and Reel", Radiation Hardening=No, REACH SVHC="No SVHC", Turn-Off Delay Time=5ms, Turn-On Delay Time=1ms, Weight=0.001376oz
J1: "MagJack 10/100BaseT, PoE+, 1X1, OG/Y, -40 to 85*C, Tab Up, RoHS", Manufacturer=Abracon, Manufacturer Part Number=ARJM11C7-114-BA-EW2, Author=GK, Component Type=Standard, ComponentHeight=13.61mm, CreateDate=05.11.2012, Family=RJ45, HelpURL=\\cern.ch\dfs\Applications\Altium\Datasheets\BELFUSE_0826-1X1T-GJ-F.pdf, LatestRevisionDate=05.11.2012, Mounted=Yes, Part Description="1 Port, Orange Green/Yellow LEDs, RJ45 10/100BaseT, PoE, Ethernet MagJack® Connector Module", Part Number=ARJM11C7-114-BA-EW2, Pin Count=18, PressFit=No, Sense=No, SMD=No, Socket=No, Status=None
J2 J3: library part 632723300011, "USB 3.1 Type C, Receptacle, Horizontal, THR", Manufacturer="Wurth Elektronik", Operating Temperature="-40 to +105degC", Rated Current=5A, Working Voltage=20VAC, Application="USB 3.1", ComponentLink1Description=Manufacturer, ComponentLink1URL=http://www.we-online.de, ComponentLink2Description=Datasheet, ComponentLink2URL=https://katalog.we-online.com/em/datasheet/632723300011.pdf, Gender=Receptacle, Interface Type="Type C", Manufacturer Part Number=632723300011, Mounting Technology=THR, Packaging="Tape and Reel", Pin Number=24, Published Date="August 2020", Type=Horizontal
L1: library part IND_1.5UH_2%_COILCRAFT_1812CS, "Inductor With Core", Case=1812, Manufacturer=COILCRAFT, Manufacturer Part Number=1812CS-152XGL, Power=430mA, Resistance=1.6R, Tolerance=±2%, Author="CERN DEM JMW", Component Type=Standard, ComponentHeight=3.43mm, CreateDate=26.10.2015, HelpURL=\\cern.ch\dfs\Applications\Altium\Datasheets\IND_COILCRAFT_1812CS.pdf, LatestRevisionDate=26.10.2015, Mounted=Yes, Part Description="SMT Chip Inductor", Part Number=IND_1.5UH_2%_COILCRAFT_1812CS, Pin Count=2, Sense=No, SMD=Yes, Socket=No, Status=None
L2: library part IND_1MH_50%_WURTH_WE-SL2-744222, "Inductor Common Mode", Manufacturer="WURTH ELEKTRONIK", Manufacturer Part Number=744222, Power=800mA, Resistance=0.31R, Tolerance=±50%, Author="CERN DEM JLC", Component Type=Standard, ComponentHeight=5.3mm, CreateDate=04.06.2012, HelpURL=\\cern.ch\dfs\Applications\Altium\Datasheets\IND_WURTH_WE-SL2_744222.pdf, LatestRevisionDate=15.10.2012, Mounted=Yes, Part Description="Common Mode SMD Line Filter (WE-SL2 Series)", Part Number=IND_1MH_50%_WURTH_WE-SL2-744222, Pin Count=4, Sense=No, SMD=Yes, Socket=No, Status=None
LD2: library part LED_KINGBRIGHT_KPT-2012ZGC, "LED Green 1C 2A", Case=0805, Manufacturer=KINGBRIGHT, Manufacturer Part Number=KPT-2012ZGC, Author="CERN DEM BC", Bonding=No, Color=Green, Component Type=Standard, ComponentHeight=0.75mm, CreateDate=27.01.2021, HelpURL=\\cern.ch\dfs\Applications\Altium\Datasheets\LED_KINGBRIGHT_KPT-2012ZGC.pdf, LatestRevisionDate=27.01.2021, Mounted=Yes, PackageDescription="SMT Green LED, Case 2012, Body L 2.00mm X  W 1.25mm X H 0.75mm", Part Description="2.0X1.25mm, SMD Green Chip LED Lamp, KPT-2012 Series", Part Number=LED_KINGBRIGHT_KPT-2012ZGC, Pin Count=2, PressFit=No, Sense=No, SMD=Yes, Socket=No
LD3: library part LED_KINGBRIGHT_KPT-2012VBC-D, "LED Blue 1C 2A", Case=0805, Manufacturer=KINGBRIGHT, Manufacturer Part Number=KPT-2012VBC-D, Author="CERN DEM BC", Bonding=No, Color=Blue, Component Type=Standard, ComponentHeight=0.75mm, CreateDate=27.01.2021, HelpURL=\\cern.ch\dfs\Applications\Altium\Datasheets\LED_KINGBRIGHT_KPT-2012VBC-D.pdf, LatestRevisionDate=27.01.2021, Mounted=Yes, PackageDescription="SMT Blue LED, Case 2012, Body L 2.00mm X  W 1.25mm X H 0.75mm", Part Description="2.0X1.25mm, SMD Blue Chip LED Lamp, KPT-2012 Series", Part Number=LED_KINGBRIGHT_KPT-2012VBC-D, Pin Count=2, PressFit=No, Sense=No, SMD=Yes, Socket=No
LP1: library part LEDLP_DIALIGHT_515-1049F, "LED Light Pipe x1 Type1", Manufacturer=DIALIGHT, Manufacturer Part Number=515-1049F, Author="CERN DEM JLC", Bonding=No, Component Type=Standard, ComponentHeight=5.3mm, CreateDate=24.01.2017, HelpURL=\\cern.ch\dfs\Applications\Altium\Datasheets\LEDLP_DIALIGHT_515-1049F.pdf, LatestRevisionDate=24.01.2017, Mounted=Yes, PackageDescription="Right Angle Single Element 3.56mm Round Lightpipe", Part Description="Right Angle Single Element 3.56mm Round Lightpipe", Part Number=LEDLP_DIALIGHT_515-1049F, Pin Count=0, PressFit=No, Sense=No, SMD=No, Socket=No
M1: "Ultra Miniature PoE, 5V, w/Thermal Protection", Manufacturer=Silvertel, Supplier Part Number 1=480-AG9905MT, Manufacturer Part Number=AG9905-MT, Pricing 1="1=8,19000, 10=8,13000, 20=7,75000, 50=7,75000, 100=7,14000, 1000=7,14000, 10000=7,14000 (USD)", RoHS=No, Supplier 1=Mouser
R1 R8 R14 R15: library part R0603_5K1_1%_0.1W_100PPM, "Resistor - 1%", Case=0603, Manufacturer=GENERIC, Manufacturer1 ComponentHeight=0.55mm, Manufacturer1 Example="NIC COMPONENT", Manufacturer1 Part Number=NRC06F5101TRF, Power=0.1W, Tolerance=±1%, Author="CERN DEM JLC", Component Type=Standard, CreateDate=03.12.2007, HelpURL=\\cern.ch\dfs\Applications\Altium\Datasheets\R0603_NIC_NRC.pdf, LatestRevisionDate=13.03.2008, Manufacturer Part Number=R0603_5K1_1%_0.1W_100PPM, Mounted=Yes, Part Description="General Purpose Thick Film Chip Resistor", Part Number=R0603_5K1_1%_0.1W_100PPM, Pin Count=2, PressFit=No, Sense=No, SMD=Yes, Socket=No, Status=Preferred, TC=±100ppm/°C
R2 R13: library part R0603_280R_1%_0.1W_100PPM, "Resistor - 1%", Case=0603, Manufacturer=GENERIC, Manufacturer1 ComponentHeight=0.55mm, Manufacturer1 Example=VISHAY, Manufacturer1 Part Number=CRCW0603280RFKEA, Power=0.1W, Tolerance=±1%, Author="CERN DEM JLC", Component Type=Standard, CreateDate=14.03.2018, HelpURL="\\cern.ch\dfs\Applications\Altium\Datasheets\R0603_VISHAY_CRCW e3.pdf", LatestRevisionDate=14.03.2018, Manufacturer Part Number=R0603_280R_1%_0.1W_100PPM, Mounted=Yes, Part Description="General Purpose Thick Film Chip Resistor", Part Number=R0603_280R_1%_0.1W_100PPM, Pin Count=2, PressFit=No, Sense=No, SMD=Yes, Socket=No, Status=Preferred, TC=±100ppm/°C
R3 R4: library part R0603_75R_1%_0.1W_100PPM, "Resistor - 1%", Case=0603, Manufacturer=GENERIC, Manufacturer1 ComponentHeight=0.55mm, Manufacturer1 Example="NIC COMPONENT", Manufacturer1 Part Number=NRC06F75R0TRF, Power=0.1W, Tolerance=±1%, Author="CERN DEM JLC", Component Type=Standard, CreateDate=03.12.2007, HelpURL=\\cern.ch\dfs\Applications\Altium\Datasheets\R0603_NIC_NRC.pdf, LatestRevisionDate=13.03.2008, Manufacturer Part Number=R0603_75R_1%_0.1W_100PPM, Mounted=Yes, Part Description="General Purpose Thick Film Chip Resistor", Part Number=R0603_75R_1%_0.1W_100PPM, Pin Count=2, PressFit=No, Sense=No, SMD=Yes, Socket=No, Status=Preferred, TC=±100ppm/°C
R6 R10 R12: library part R0603_47K_1%_0.1W_100PPM, "Resistor - 1%", Case=0603, Manufacturer=GENERIC, Manufacturer1 ComponentHeight=0.55mm, Manufacturer1 Example="NIC COMPONENT", Manufacturer1 Part Number=NRC06F4702TRF, Power=0.1W, Tolerance=±1%, Author="CERN DEM JLC", Component Type=Standard, CreateDate=03.12.2007, HelpURL=\\cern.ch\dfs\Applications\Altium\Datasheets\R0603_NIC_NRC.pdf, LatestRevisionDate=13.03.2008, Manufacturer Part Number=R0603_47K_1%_0.1W_100PPM, Mounted=Yes, Part Description="General Purpose Thick Film Chip Resistor", Part Number=R0603_47K_1%_0.1W_100PPM, Pin Count=2, PressFit=No, Sense=No, SMD=Yes, Socket=No, Status=Preferred, TC=±100ppm/°C
R7 R9 R11: library part R0603_330R_1%_0.1W_100PPM, "Resistor - 1%", Case=0603, Manufacturer=GENERIC, Manufacturer1 ComponentHeight=0.55mm, Manufacturer1 Example="NIC COMPONENT", Manufacturer1 Part Number=NRC06F3300TRF, Power=0.1W, Tolerance=±1%, Author="CERN DEM JLC", Component Type=Standard, CreateDate=03.12.2007, HelpURL=\\cern.ch\dfs\Applications\Altium\Datasheets\R0603_NIC_NRC.pdf, LatestRevisionDate=13.03.2008, Manufacturer Part Number=R0603_330R_1%_0.1W_100PPM, Mounted=Yes, Part Description="General Purpose Thick Film Chip Resistor", Part Number=R0603_330R_1%_0.1W_100PPM, Pin Count=2, PressFit=No, Sense=No, SMD=Yes, Socket=No, Status=Preferred, TC=±100ppm/°C
T2 T3: "NPN Transistor", Case=SOT23-3, Manufacturer="NXP SEMICONDUCTORS", Author="CERN DEM JLC", Bonding=No, Component Type=Standard, ComponentHeight=1.1mm, CreateDate=10.02.2010, Device=MMBT3904, HelpURL=\\cern.ch\dfs\Applications\Altium\Datasheets\MMBT3904.pdf, LatestRevisionDate=10.02.2010, Manufacturer Part Number=MMBT3904, Mounted=Yes, PackageDescription="SOT23, 0.95mm Pitch; 3 Pin, 1.30mm W X 2.90mm L X 1.10mm H body, IPC Medium Density", Part Description="40V 200mA NPN Switching Transistor", Part Number=MMBT3904, Pin Count=3, PressFit=No, Sense=No, SMD=Yes, Socket=No

## Via types
v1: diameter 0.5, hole 0.25, Top Layer to Bottom Layer, 35 vias
v2: diameter 0.6, hole 0.3, Top Layer to Bottom Layer, 16 vias

## Nets (pads, with @x,y where several pads share a name; then routed paths per layer and width w, separated by ;. In a path a pad name is that pad's centre, name@x,y a point inside that pad or via, vN(x,y) a via of type N, cw(c..) or ccw(c..) an arc to the next point about the centre after c; other vN are vias at no path point)
ETH_LED1: J1.L2 J2.A8 | length 60.4
  Top Layer w0.203: v2(55.1,38.3) 56.806,38.3 57.256,38.75 J2.A8
  Bottom Layer w0.305: J1.L2 17.42,28.6 21.3,28.6 25,32.3 28.8,32.3 30.65,30.45 34.8,26.3 52.7,26.3 55.1,28.7 v2(55.1,38.3)
ETH_LED2: J1.L4 J2.B8 | length 63.6
  Bottom Layer w0.305: J1.L4 15.72,16.7 19,16.7 20.072,17.772 ccw(c18.8,19.285) 20.313,18.013 21.2,18.9 23.2,18.9 24.4,17.7 27.4,17.7 33.129,23.429 44.417,23.429 44.446,23.4 54.3,23.4 63.2,32.3 63.2,35.3 61.3,37.2 J2.B8
ETHU_RX_N: J1.3 J2.B10 | length 47.1
  Bottom Layer w0.165: J1.3 25.15,22.852 25.247,22.949 25.87,22.949 27.129,24.208 53.921,24.208 62.392,32.679 62.392,34.851 61.097,36.146 60.759,36.146 60.505,36.4 J2.B10
ETHU_RX_P: J1.5 J2.B11 | length 46.2
  Bottom Layer w0.165: J1.5 25.15,23.338 25.247,23.241 25.749,23.241 27.008,24.5 53.8,24.5 62.1,32.8 62.1,34.73 60.976,35.854 60.759,35.854 60.505,35.6 J2.B11
ETHU_TX_N: J1.8 J2.A10 | length 46.1
  Top Layer w0.165: v2(56.576,38.977) 56.659,39.06 56.659,39.409 57.104,39.853 57.766,39.853 57.802,39.817 58.403,39.817 J2.A10
  Bottom Layer w0.165: J1.8 27.69,29.202 27.787,29.299 28.901,29.299 32.992,25.208 53.208,25.208 56.1,28.1 56.1,38.808 56.224,38.932 56.531,38.932 v2(56.576,38.977)
ETHU_TX_P: J1.10 J2.A11 | length 46.1
  Top Layer w0.165: v2(56.086,39.514) 56.169,39.597 56.433,39.597 56.982,40.147 57.766,40.147 57.802,40.183 58.403,40.183 J2.A11
  Bottom Layer w0.165: J1.10 27.69,29.688 27.787,29.591 29.022,29.591 33.113,25.5 53.087,25.5 55.808,28.221 55.808,38.929 56.018,39.138 56.018,39.446 v2(56.086,39.514)
GND: C1.1 C2.1 C5.1 C7.2 C8.2 C9.2 C10.2 C11.1 C12.1 C13.1 D2.1 IC1.2 IC1.5 J2.A1 J2.A12 J2.B1 J2.B12 J2.G1 J2.G2 J3.A1 J3.A12 J3.B1 J3.B12 J3.G1 J3.G2 LD2.1 M1.3 R11.2 R12.1 R14.1 R15.1 | length 8.4
  Top Layer w0.406: IC1.2 62.375,56.275 62.55,56.45 63.25,56.45 R11.2 ; R11.2@63.35,56.6 v1(64.5,56.6)
  Top Layer w0.508: C12.1 v1(26.8,55)
  Top Layer w0.635: v1(21.1,40.1) 21.418,39.783 21.418,39.133 21.65,38.9 LD2.1 ; v1(52.6,51.6) C11.1 ; v1(53.6,50.5) R12.1
  other v1: 53.5,15.5 55.5,15.5 57.5,15.5 59.5,15.5 61.5,15.5 40.5,20.5 41.5,20.5 40.5,21.5 41.5,21.5 19,45.5 19.5,46 49,46 49,47 49,48 63.5,51.1 63.5,52.2 19.5,54 19,54.5 53.8,57.797 53.8,58.9
NetC3_1: C3.1 C4.1 C6.2 | length 4.5
  Top Layer w0.635: C6.2 32.6,12.207 C6.2@32.857,11.95
  Top Layer w0.762: C6.2@32.857,11.95 C4.1 C3.1
NetC3_2: C3.2 R3.1 | length 6.1
  Top Layer w0.406: R3.1 34.8,16.7 36.8,14.7 C3.2
NetC4_2: C4.2 R4.1 | length 3
  Top Layer w0.406: R4.1 34.2,14.8 34.8,14.2 C4.2
NetC7_1: C7.1 C8.1 C9.1 L1.1 M1.1 M1.2
NetC12_2: C12.2 D11.1 L2.4 M1.5 M1.6 | length 15.6
  Top Layer w0.305: D11.1@27.1,42.325 31.33,46.555 L2.4
  Top Layer w0.406: D11.1 D11.1@27.1,42.325
  Top Layer w0.61: C12.2 31.08,50.9 L2.4
NetC13_2: C13.2 L2.3 M1.7 M1.8 | length 4.7
  Top Layer w0.61: C13.2 37.5,28.355 37.82,28.675 M1.8
NetD1_1: D1.1 D3.1 D4.1 D5.1 D10.2 L2.1 | length 24.8
  Top Layer w0.61: D10.2 D10.2@30.825,40.6 ; L2.1 31.33,41.105 D10.2@30.825,40.6 ; D5.1 33.799,23.888 32.8,24.887 32.8,27.9 ; D3.1 32.812,27.888 32.8,27.9 ; D4.1 32.812,31.888 32.8,31.9 ; D1.1 32.812,35.888 32.8,35.9 ; D10.2@30.825,40.6 32.8,38.625 32.8,35.9 ; 32.8,27.9 32.8,31.9 ; 32.8,31.9 32.8,35.9
NetD6_2: D6.2 D7.2 D8.2 D9.2 D10.1 L2.2 R7.1 T2.3 | length 32.7
  Top Layer w0.305: R7.1 27.3,46.25 T2.3@27.85,45.7 ; T2.3 v2(29.1,45.7) ; v2(32.846,45.074) 33.87,44.05 L2.2
  Top Layer w0.406: T2.3@27.85,45.7 T2.3
  Top Layer w0.61: D9.2 33.88,25.888 34.977,26.986 34.977,29.888 ; D7.2 34.977,29.888 ; D8.2 34.977,33.888 ; D6.2 34.977,37.888 ; L2.2 33.87,41.105 34.375,40.6 D10.1 34.977,40.373 34.977,37.888 ; 34.977,29.888 34.977,33.888 ; 34.977,33.888 34.977,37.888
  Bottom Layer w0.305: v2(29.1,45.7) 32.22,45.7 v2(32.846,45.074)
NetD11_2: D11.2 LD3.2 R6.2 | length 7.9
  Top Layer w0.305: LD3.2 D11.2@26.55,37.1 ; R6.2@24.15,41 D11.2@26.528,38.622
  Top Layer w0.406: R6.2 R6.2@24.15,41 ; D11.2@26.528,38.622 26.528,38.222 D11.2 D11.2@26.55,37.1
NetIC1_3: IC1.3 R10.1 R12.2 | length 9.4
  Top Layer w0.203: R12.2 R10.1 56.3,53.783 v2(56.817,54.3) ; v2(59.442,56.925) IC1.3
  Bottom Layer w0.203: v2(56.817,54.3) v2(59.442,56.925)
NetIC1_4: IC1.4 R11.1 | length 2.6
  Top Layer w0.203: IC1.4 62.725,57.575 63.35,58.2 R11.1
NetJ1_4: J1.4 R3.2 | length 7.8
  Top Layer w0.406: R3.2 v2(31.2,18.1)
  Inner Layer 1 w0.406: J1.4 31.163,19.622 31.163,18.137 v2(31.2,18.1)
NetJ1_9: J1.9 R4.2 | length 20.7
  Top Layer w0.406: v2(27.4,14.8) R4.2
  Inner Layer 1 w0.406: J1.9 23.5,27.795 23.5,18.7 v2(27.4,14.8)
NetJ1_L1: J1.L1 R2.1 | length 10.2
  Top Layer w0.305: R2.1 14.3,35.7 16.25,33.75 J1.L1
NetJ1_L3: J1.L3 R9.1 | length 24.6
  Top Layer w0.305: R9.1 12.3,24.5 16.25,20.55 J1.L3
NetJ2_A5: J2.A5 R1.1 | length 2.5
  Top Layer w0.203: R1.1 56.5,37.4 57.448,37.4 57.598,37.25 J2.A5
NetJ2_B5: J2.B5 R8.1 | length 7.5
  Top Layer w0.203: J2.B5 61.4,38.8 64.1,41.5 R8.1
NetJ3_A5: J3.A5 R14.2 | length 16
  Top Layer w0.203: v2(16.2,40.3) R14.2 ; J3.A5 19.459,50.779 20.279,50.779 20.5,51 v2(21,51)
  Bottom Layer w0.203: v2(16.2,40.3) 21,45.1 v2(21,51)
NetJ3_B5: J3.B5 R15.2 | length 6.2
  Top Layer w0.203: R15.2 15.9,44.1 15.9,47.62 J3.B5
NetLD2_2: LD2.2 R13.1 | length 3
  Top Layer w0.305: R13.1@22.297,40.678 LD2.2@23.653,39.322
  Top Layer w0.406: R13.1 22.05,41 22.297,40.753 R13.1@22.297,40.678 ; LD2.2@23.653,39.322 23.653,39.247 24,38.9 LD2.2
NetLD3_1: LD3.1 T3.3 | length 9.7
  Top Layer w0.305: T3.3 21.15,45.7 21.002,45.552 21.002,45.352 20.4,44.75 20.4,39 20.747,38.653 20.747,38.003 21.65,37.1 LD3.1
NetR6_1: R6.1 T2.2 T3.1 | length 4.5
  Top Layer w0.305: R6.1@24.05,42.6 23.65,43 T3.1 T2.2
  Top Layer w0.406: R6.1@24.05,42.6 R6.1
NetR7_2: R7.2 T2.1 T3.2 | length 4.2
  Top Layer w0.305: T3.2 T2.1 ; T2.1@25.725,46.675 R7.2@25.725,48.675
  Top Layer w0.406: R7.2 R7.2@25.725,48.675 ; T2.1@25.725,46.675 T2.1
POE_IN1: D1.2 D6.1 J1.7 | length 17.6
  Top Layer w0.61: J1.7 23.795,26.905 23.1,27.6 23.1,30 28.3,35.2 30.871,35.2 D1.2 D6.1
POE_IN2: D3.2 D7.1 J1.2 | length 10.9
  Top Layer w0.61: J1.2 30.3,23.165 30.3,26.629 D3.2 D7.1
POE_IN3: D4.2 D8.1 J1.6 | length 9.9
  Top Layer w0.61: J1.6 29.4,27.345 29.4,29.729 D4.2 D8.1
POE_IN4: D5.2 D9.1 J1.1 | length 12.4
  Top Layer w0.61: J1.1 26.035,18.4 28.4,18.4 31.559,21.559 D5.2 D9.1
SHIELD: C6.1 J1.S1 J1.S2 J2.Shell J3.Shell | length 9.9
  Top Layer w0.762: J1.S2 26.705,12.4 C6.1
  Bottom Layer w0.635: J3.Shell@12.2,45.63 J3.Shell@12.3,45.73
USB_D_N: J2.A7 J2.B7 J3.A7 J3.B7 | length 67.8
  Top Layer w0.203: J3.B7 18.782,49.798 19.382,49.798 J3.A7
  Top Layer w0.235: v2(57.568,38.202) 57.592,38.226 58.446,38.226 J2.A7
  Bottom Layer w0.235: J3.B7 18.068,50.4 17.861,50.194 16.9,50.194 15.6,51.494 15.6,55.6 20.513,60.513 39.24,60.513 57.976,41.776 57.976,38.576 ; v2(57.568,38.202) 57.602,38.202 57.976,38.576 ; J2.B7 59.608,37.6 59.401,37.806 58.746,37.806 57.976,38.576
USB_D_P: J2.A6 J2.B6 J3.A6 J3.B6 | length 70.9
  Top Layer w0.203: J2.A6 58.518,37.798 59.118,37.798 J2.B6
  Top Layer w0.235: J3.A6 v2(20.275,50.25)
  Inner Layer 1 w0.235: v2(20.275,50.25) v2@20.3,50.225
  Bottom Layer w0.235: v2(20.275,50.25) 18.85,50.25 18.2,49.6 J3.B6 18.068,49.6 17.861,49.806 16.74,49.806 15.213,51.333 15.213,55.76 20.352,60.9 39.4,60.9 58.363,41.937 58.363,38.737 58.906,38.194 59.401,38.194 59.608,38.4 J2.B6
VBUS: C1.2 D2.2 IC1.7 J2.A4 J2.A9 J2.B4 J2.B9 R1.2 R2.2 R8.2 R9.2 | length 80.5
  Top Layer w0.203: R1.2@56.498,35.798 56.977,35.798 57.35,36.171 v2(57.35,36.75)
  Top Layer w0.305: R9.2 R2.2 v2(14.3,48.2) ; R1.2 R1.2@56.498,35.798 ; v2(57.25,39.279) 57.276,39.252 58.468,39.252 58.472,39.248 59.672,39.248 J2.B4 ; v2(57.35,36.75) J2.A4 58.472,36.752 59.672,36.752 J2.B9 ; D2.2 60.8,47.7 61.3,47.2 61.3,45.45 62.5,44.25 R8.2
  Bottom Layer w0.305: v2(14.3,48.2) 14.3,56.2 19.9,61.8 39.8,61.8 52.266,49.334 v1(59.113,49.334)
  other v1: 58.4,45.4 59,45.4 59.6,45.4
VPOE: C10.1 C11.2 IC1.8 L1.2 R10.2
  other v1: 60.5,24.5 61.5,24.5 61.5,25.5 62.5,25.5 55,53.989 54,54.385
VUSB: C2.2 C5.2 IC1.6 J3.A4 J3.A9 J3.B4 J3.B9 R13.2 | length 9.6
  Top Layer w0.305: J3.A9 20.713,48.75 21.063,49.1 21.9,49.1 22.5,48.5 22.5,44.8 22,44.3 R13.2
pads on no net: B1.1 B2.1 IC1.1 J1.MH1 J1.MH2 J2.A2 J2.A3 J2.B2 J2.B3 J3.A2 J3.A3 J3.A8 J3.A10 J3.A11 J3.B2 J3.B3 J3.B8 J3.B10 J3.B11 LP1.1 LP1.2 M1.4

## Polygon pours and split planes (outlines as drawn)
GND on Top Layer "GND_L01_P020" (solid, pour order 20): 59.929,36.429 59.929,34.5 57.871,34.5 57.871,35.4 58.9,35.4
GND on Top Layer "GND_L01_P019" (solid, pour order 19): 60,39.535 60,41.5 57.872,41.5 57.872,40.602 58.934,40.602
GND on Top Layer "GND_L01_P018" (solid, pour order 18): 61.028,53.55 65,53.55 65,46.215 62,46.215 62,49.1 61.028,50.072 61.026,50.736
GND on Top Layer "PA3V3_L01_P-001" (solid, pour order 16): 56.049,57.351 52.055,57.348 52.055,59.492 54.355,59.492 56.05,57.797
GND on Top Layer "PA3V3_L01_P-001" (solid, pour order 15): 18,48.529 18,41 20.2,41 20.2,47.5 19.029,47.5
GND on Top Layer "PA3V3_L01_P-001" (solid, pour order 14): 18,51.471 18,59.8 20.1,59.8 20.1,52.5 19.029,52.5
VBUS on Top Layer "VBUS_L01_P011" (solid, pour order 11): 54.6,56.5 56.8,56.5 60,53.3 60,45 58,45 58,54.132 56.082,56.05 54.6,56.05
VPOE on Top Layer "VPOE_L01_P010" (solid, pour order 10): 56.046,55.849 54.449,55.849 53.6,55 52,55 52,53.5 53.1,53.5 53.4,53.2 53.4,52 55.5,52 55.5,54.3 56.046,54.846
VUSB on Top Layer "VUSB_L01_P008" (solid, pour order 8): 18,48.529 21.529,48.529 23.8,50.8 23.8,59.1 21.9,59.1 21.9,53.9 20.5,52.5 20.5,51.8 20.171,51.471 18,51.471 18,51.031 20.5,51.031 21.426,51.031 21.426,50.795 20.5,49.869 20.5,49.311 20.163,48.973 18,48.973
VUSB on Top Layer "VUSB_L01_P009" (solid, pour order 9): 56,57.15 56,56.7 54.5,56.7 53.5,55.7 45,55.7 39.1,61.6 26.3,61.6 21.9,57.2 21.9,59.8 25.6,63.5 40.1,63.5 46.45,57.15
GND on Top Layer "GND_L01_P006" (solid, pour order 6): 56,44.138 56,46 51,46 50.5,46.5 50.5,49 47.5,49 47.5,44.138
GND on Top Layer "GND_L01_P005" (solid, pour order 5): 51.5,18.7 63.5,18.7 63.5,14.5 51.5,14.5
GND on Top Layer "GND_L01_P004" (solid, pour order 4): 39.5,27 45.5,27 45.5,19.5 39.5,19.5
VPOE on Top Layer "VPOE_L01_P003" (solid, pour order 3): 60,19.5 63.5,19.5 63.5,27 56,27 56,23 57,22 59.5,22 60,21.5
NetC7_1 on Top Layer "NETC7_1_L01_P002" (solid, pour order 2): 51,31.8 55,31.8 55,23 56.5,21.5 59.2,21.5 59.2,19.5 48,19.5 48,23.6 51,26.6
NetC12_2 on Top Layer "NETC12_2_L01_P001" (solid, pour order 1): 30.5,50 32.2,50 32.2,57.7 34,59.5 38,59.5 39.8,57.7 39.8,51.8 37,49 37,44.3 41,44.3 41,49 42,50 42,58.2 39,61.2 33.3,61.2 30.5,58.4
NetC13_2 on Top Layer "NETC13_2_L01_P000" (solid, pour order 0): 33,52.2 34.7,52.2 34.7,47.2 36.6,45.3 36.6,44.2 37,43.8 38.1,43.8 41,40.9 41,28.3 37,28.3 37,41.1 34.7,43.4 34.7,44.8 33,46.5 33,48
VPOE on Inner Layer 1 "VPOE_L02_P017" (solid, pour order 17): 53.6,54.7 53.6,53.5 55.4,53.5 62.5,46.4 62.5,27.5 59.25,24.25 60.73,22.77 64,26.04 64,47.1 56.4,54.7
VBUS on Inner Layer 1 "VBUS_L02_P012" (solid, pour order 12): 57,36.5 60,36.5 60,46.5 57,46.5
GND on Inner Layer 2 "GND_L03_P013" (solid, pour order 13): 10.2,10 10.2,65.9 67.8,65.9 67.8,10.1

## Silkscreen, mask and mechanical layers (free items; w line width, h text height)
Top Overlay:
  text "DiPho PoE adapter / v1.1" at 11.7,59.62 h1
  text "WUT ISE 2021" at 60.199,11.077 h1
Mechanical 1:
  the board outline again, w0.254

## Text inside footprints (layer, text, board x,y; h text height)
J2: Mechanical 2 "PCB Edge" at 70,36.3 h0.61 r90
J3: Mechanical 2 "PCB Edge" at 7.9,51.7 h0.61 r270